# EAGLE board simple-bob-adapter (EAGLE 9.0.1)
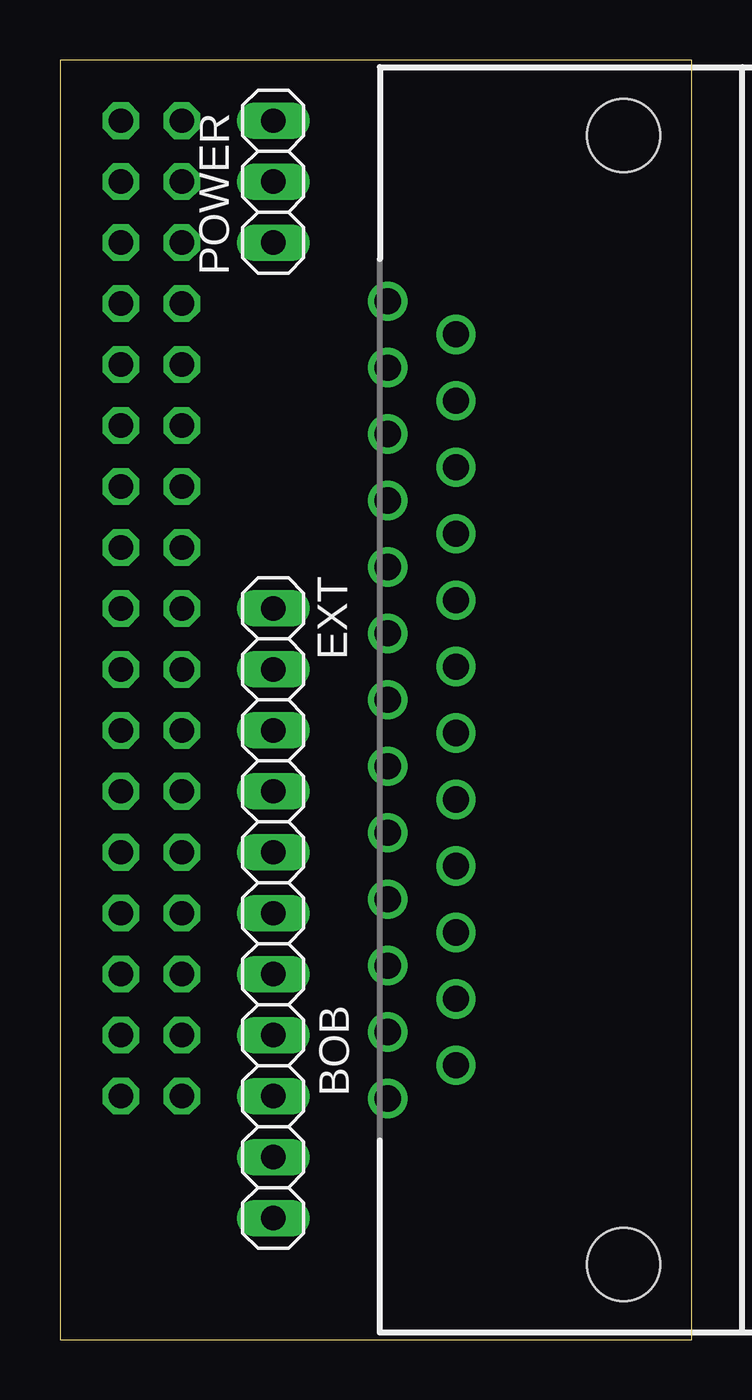
[diagram p0: board, top side]
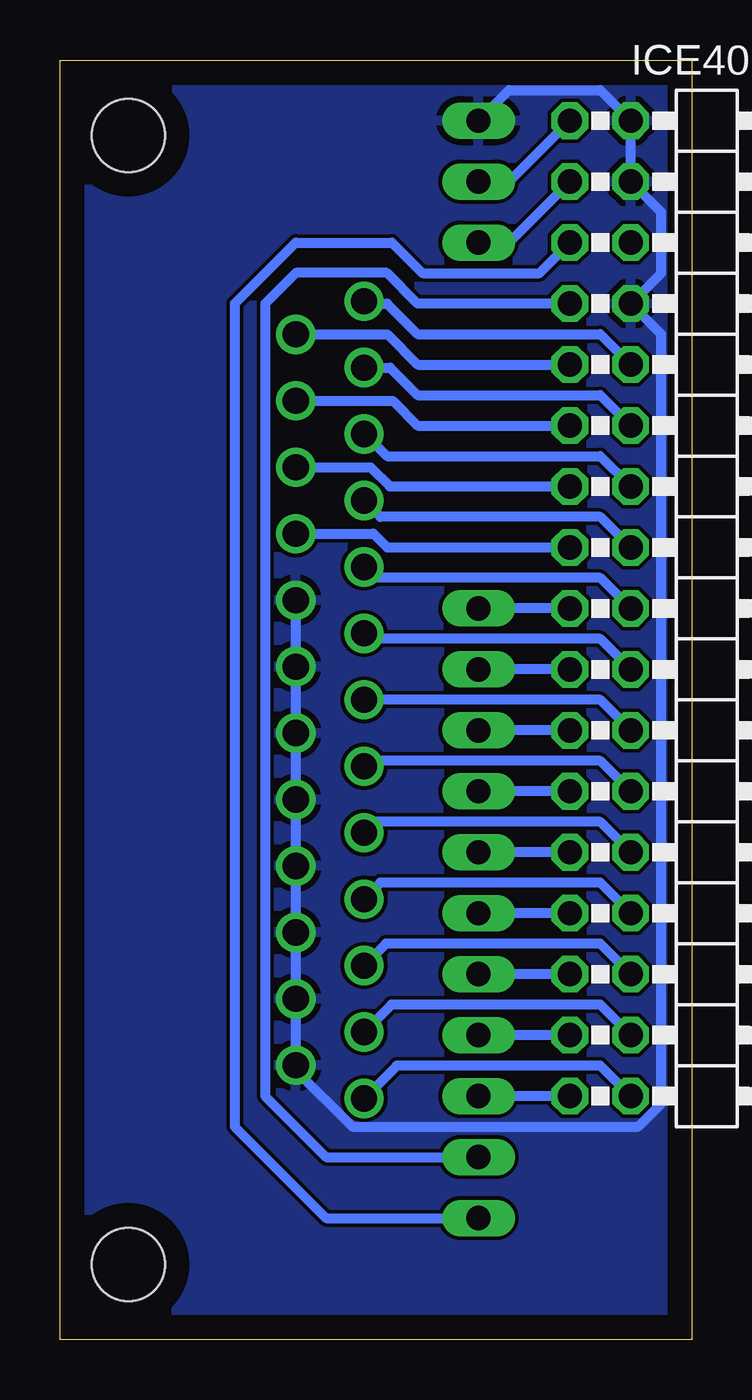
[diagram p1: board, bottom side, seen from below]

Size 26.34 x 53.33 mm. Coordinates in mm from the lower left corner, seen from the top.
Outline: 0,0 26.34,0 26.34,53.33 0,53.33 0,0
Copper layers (1*16): Top 0.035mm / dielectric 1.5mm / Bottom 0.035mm
Design rules "default": minimum track width 6mil, minimum drill 0.35mm, track to track 6mil, track to pad 6mil, pad to pad 6mil, via to via 6mil, smd to smd 6mil, copper to edge 40mil, drill to drill 6mil, minimum pad ring 10mil, minimum via ring 8mil, stop-mask expansion 4mil, vias tented up to drill 0mil, thermal gap 10mil

## Footprints (pad centres in the part's own frame; a part is rotated, then mirrored left to right if it is on the bottom)
H2R25RA = drill 1.092: 1 16.612,7.925; 2 13.843,7.925; 3 11.074,7.925; 4 8.306,7.925; 5 5.537,7.925; 6 2.769,7.925; 7 0,7.925; 8 -2.769,7.925; 9 -5.537,7.925; 10 -8.306,7.925; 11 -11.074,7.925; 12 -13.843,7.925; 13 -16.612,7.925; 14 15.227,5.08; 15 12.459,5.08; 16 9.69,5.08; 17 6.921,5.08; 18 4.153,5.08; 19 1.384,5.08; 20 -1.384,5.08; 21 -4.153,5.08; 22 -6.921,5.08; 23 -9.69,5.08; 24 -12.459,5.08; 25 -15.227,5.08 | hole 3.048: -23.52,-1.905; 23.52,-1.905
1X11 = drill 1.016 long: 1 -12.7,0; 2 -10.16,0; 3 -7.62,0; 4 -5.08,0; 5 -2.54,0; 6 0,0; 7 2.54,0; 8 5.08,0; 9 7.62,0; 10 10.16,0; 11 12.7,0
2X17/90 = drill 1.016 octagon: 1 -20.32,-6.35; 2 -20.32,-3.81; 3 -17.78,-6.35; 4 -17.78,-3.81; 5 -15.24,-6.35; 6 -15.24,-3.81; 7 -12.7,-6.35; 8 -12.7,-3.81; 9 -10.16,-6.35; 10 -10.16,-3.81; 11 -7.62,-6.35; 12 -7.62,-3.81; 13 -5.08,-6.35; 14 -5.08,-3.81; 15 -2.54,-6.35; 16 -2.54,-3.81; 17 0,-6.35; 18 0,-3.81; 19 2.54,-6.35; 20 2.54,-3.81; 21 5.08,-6.35; 22 5.08,-3.81; 23 7.62,-6.35; 24 7.62,-3.81; 25 10.16,-6.35; 26 10.16,-3.81; 27 12.7,-6.35; 28 12.7,-3.81; 29 15.24,-6.35; 30 15.24,-3.81; 31 17.78,-6.35; 32 17.78,-3.81; 33 20.32,-6.35; 34 20.32,-3.81
1X03 = drill 1.016 long: 1 -2.54,0; 2 0,0; 3 2.54,0

## Placement (x,y rotation side)
BOB  D-SUB25-H2R25RA  [H2R25RA]  21.59,26.67 90 top
EXT  [1X11]  8.89,17.78 270 top
ICE40  [2X17/90]  -1.27,30.48 270 bottom
POWER  [1X03]  8.89,48.26 90 top

## Library data of the parts
BOB = con-thomas-betts; OC_FARNELL: unknown; OC_NEWARK: unknown
EXT ICE40 POWER = pinhead

## Nets
GND: BOB.18 BOB.19 BOB.20 BOB.21 BOB.22 BOB.23 BOB.24 BOB.25 ICE40.2 ICE40.4 ICE40.8 POWER.3
N$1: BOB.1 ICE40.10
N$2: BOB.2 ICE40.12
N$3: BOB.3 ICE40.14
N$4: BOB.4 ICE40.16
N$5: BOB.5 ICE40.18
N$6: BOB.6 ICE40.20
N$7: BOB.7 ICE40.22
N$8: BOB.8 ICE40.24
N$9: BOB.9 ICE40.26
N$10: BOB.10 ICE40.28
N$11: BOB.11 ICE40.30
N$12: BOB.12 ICE40.32
N$13: BOB.13 ICE40.34
N$14: BOB.15 ICE40.11
N$15: ICE40.3 POWER.1
N$16: BOB.16 ICE40.13
N$17: BOB.17 ICE40.15
N$18: EXT.1 ICE40.17
N$19: EXT.2 ICE40.19
N$20: EXT.3 ICE40.21
N$21: EXT.4 ICE40.23
N$22: EXT.5 ICE40.25
N$23: EXT.6 ICE40.27
N$24: EXT.7 ICE40.29
N$25: EXT.8 ICE40.31
N$26: EXT.9 ICE40.33
N$27: BOB.14 ICE40.9
N$28: ICE40.1 POWER.2
N$29: EXT.10 ICE40.7
N$30: EXT.11 ICE40.5

## Tracks (layer width: path | path; a pad name or v marks a point on that pad's centre or on a via)
GND
  Bottom 0.406: BOB.18 BOB.19 BOB.20 BOB.21 BOB.22 BOB.23 BOB.24 BOB.25 16.51,11.24 14.15,8.88 2.24,8.88 1.27,9.85 1.27,41.91 ICE40.8 1.27,44.45 1.27,46.99 ICE40.4 ICE40.2 3.81,52.07 7.62,52.07 POWER.3
  pour Bottom: -12.7,57.15 41.91,57.15 41.91,-5.08 -12.7,-5.08
N$1
  Bottom 0.406: BOB.1 13.56,43.18 12.7,43.18 11.43,41.91 3.81,41.91 ICE40.10
N$2
  Bottom 0.406: BOB.2 12.57,40.51 11.43,39.37 3.81,39.37 ICE40.12
N$3
  Bottom 0.406: BOB.3 13.61,37.74 12.7,36.83 3.81,36.83 ICE40.14
N$4
  Bottom 0.406: ICE40.16 3.81,34.29 12.98,34.29 BOB.4
N$5
  Bottom 0.406: ICE40.18 3.81,31.75 13.21,31.75 BOB.5
N$6
  Bottom 0.406: ICE40.20 3.81,29.21 13.44,29.21 BOB.6
N$7
  Bottom 0.406: ICE40.22 3.81,26.67 BOB.7
N$8
  Bottom 0.406: ICE40.24 3.81,24.13 13.44,24.13 BOB.8
N$9
  Bottom 0.406: ICE40.26 3.81,21.59 13.21,21.59 BOB.9
N$10
  Bottom 0.406: ICE40.28 3.81,19.05 12.98,19.05 BOB.10
N$11
  Bottom 0.406: ICE40.30 3.81,16.51 12.75,16.51 BOB.11
N$12
  Bottom 0.406: ICE40.32 3.81,13.97 12.52,13.97 BOB.12
N$13
  Bottom 0.406: ICE40.34 3.81,11.43 12.29,11.43 BOB.13
N$14
  Bottom 0.406: BOB.15 12.46,39.13 11.43,38.1 ICE40.11
N$15
  Bottom 0.406: POWER.1 7.62,45.72 ICE40.3
N$16
  Bottom 0.406: BOB.16 13.39,36.36 12.59,35.56 ICE40.13
N$17
  Bottom 0.406: BOB.17 13.27,33.59 12.7,33.02 ICE40.15
N$18
  Bottom 0.406: ICE40.17 EXT.1
N$19
  Bottom 0.406: ICE40.19 EXT.2
N$20
  Bottom 0.406: ICE40.21 EXT.3
N$21
  Bottom 0.406: ICE40.23 EXT.4
N$22
  Bottom 0.406: ICE40.25 EXT.5
N$23
  Bottom 0.406: ICE40.27 EXT.6
N$24
  Bottom 0.406: ICE40.29 EXT.7
N$25
  Bottom 0.406: ICE40.31 EXT.8
N$26
  Bottom 0.406: ICE40.33 EXT.9
N$27
  Bottom 0.406: BOB.14 12.69,41.9 11.43,40.64 ICE40.9
N$28
  Bottom 0.406: POWER.2 7.62,48.26 ICE40.1
N$29
  Bottom 0.406: EXT.10 15.24,7.62 17.78,10.16 17.78,43.18 16.5,44.46 12.71,44.46 11.43,43.18 ICE40.7
N$30
  Bottom 0.406: EXT.11 15.24,5.08 19.05,8.89 19.05,43.18 16.51,45.72 12.5,45.72 11.23,44.45 6.35,44.45 ICE40.5